# EAGLE board mlx90621_panel_shield (EAGLE 7.3.0)
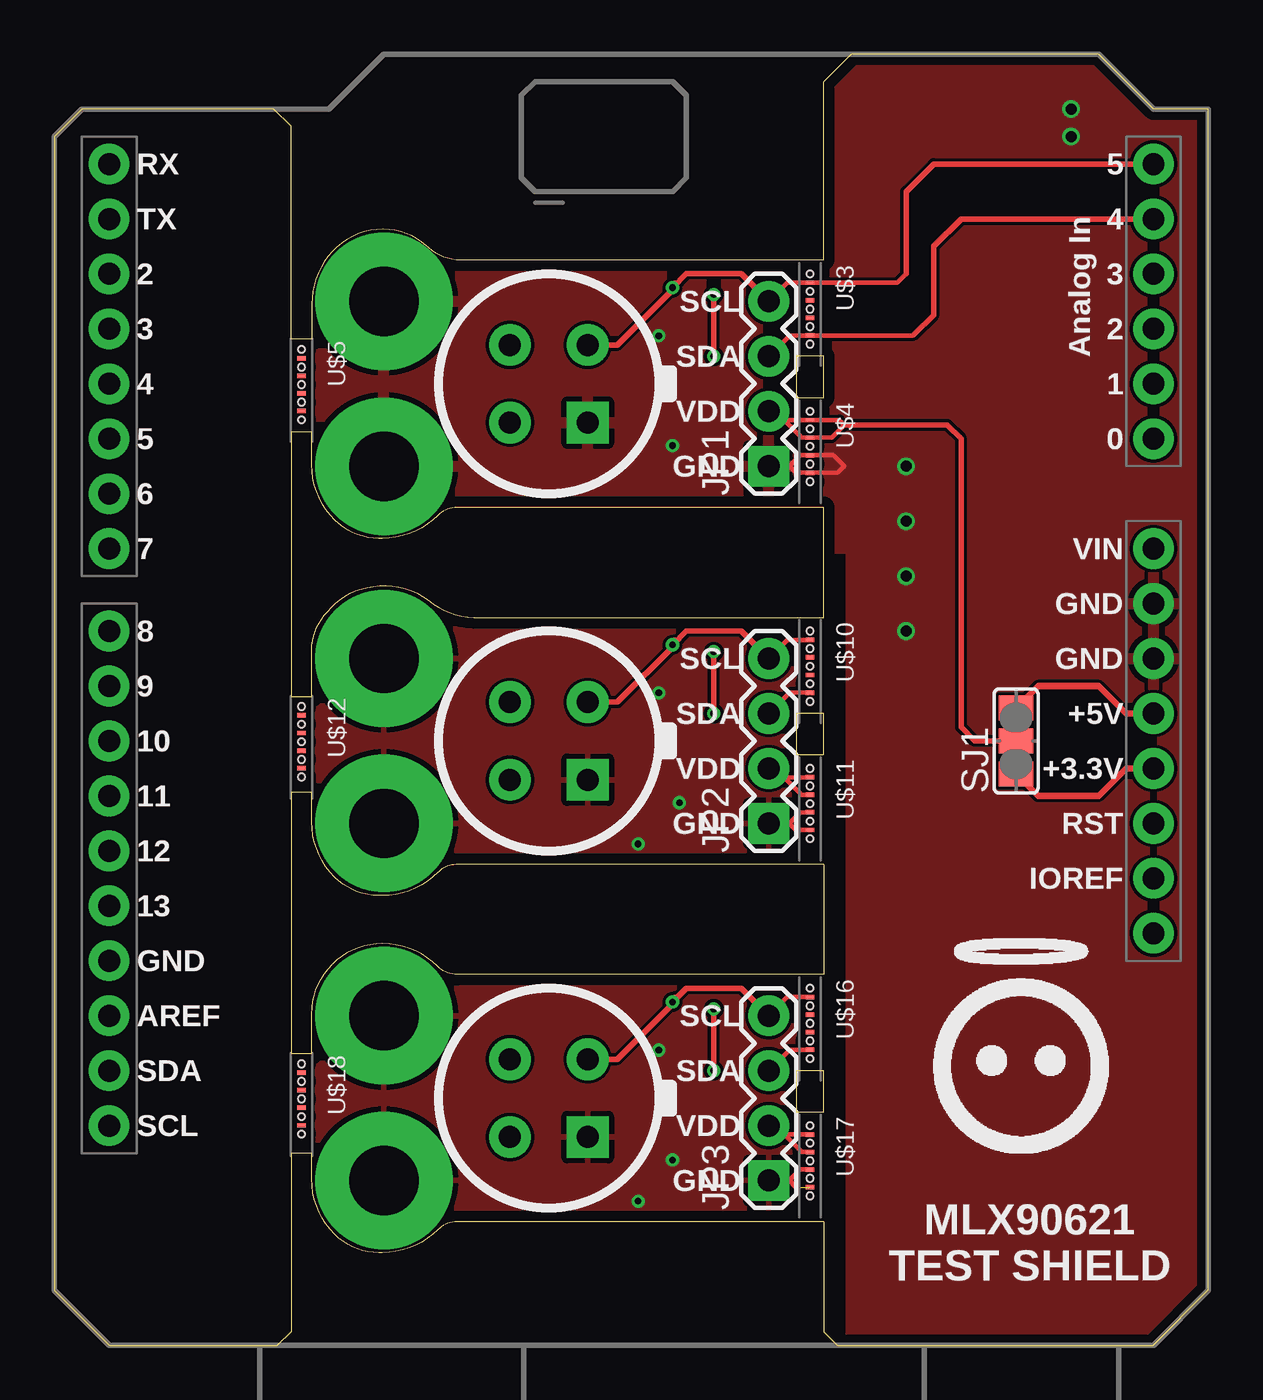
[diagram p0: board, top side]
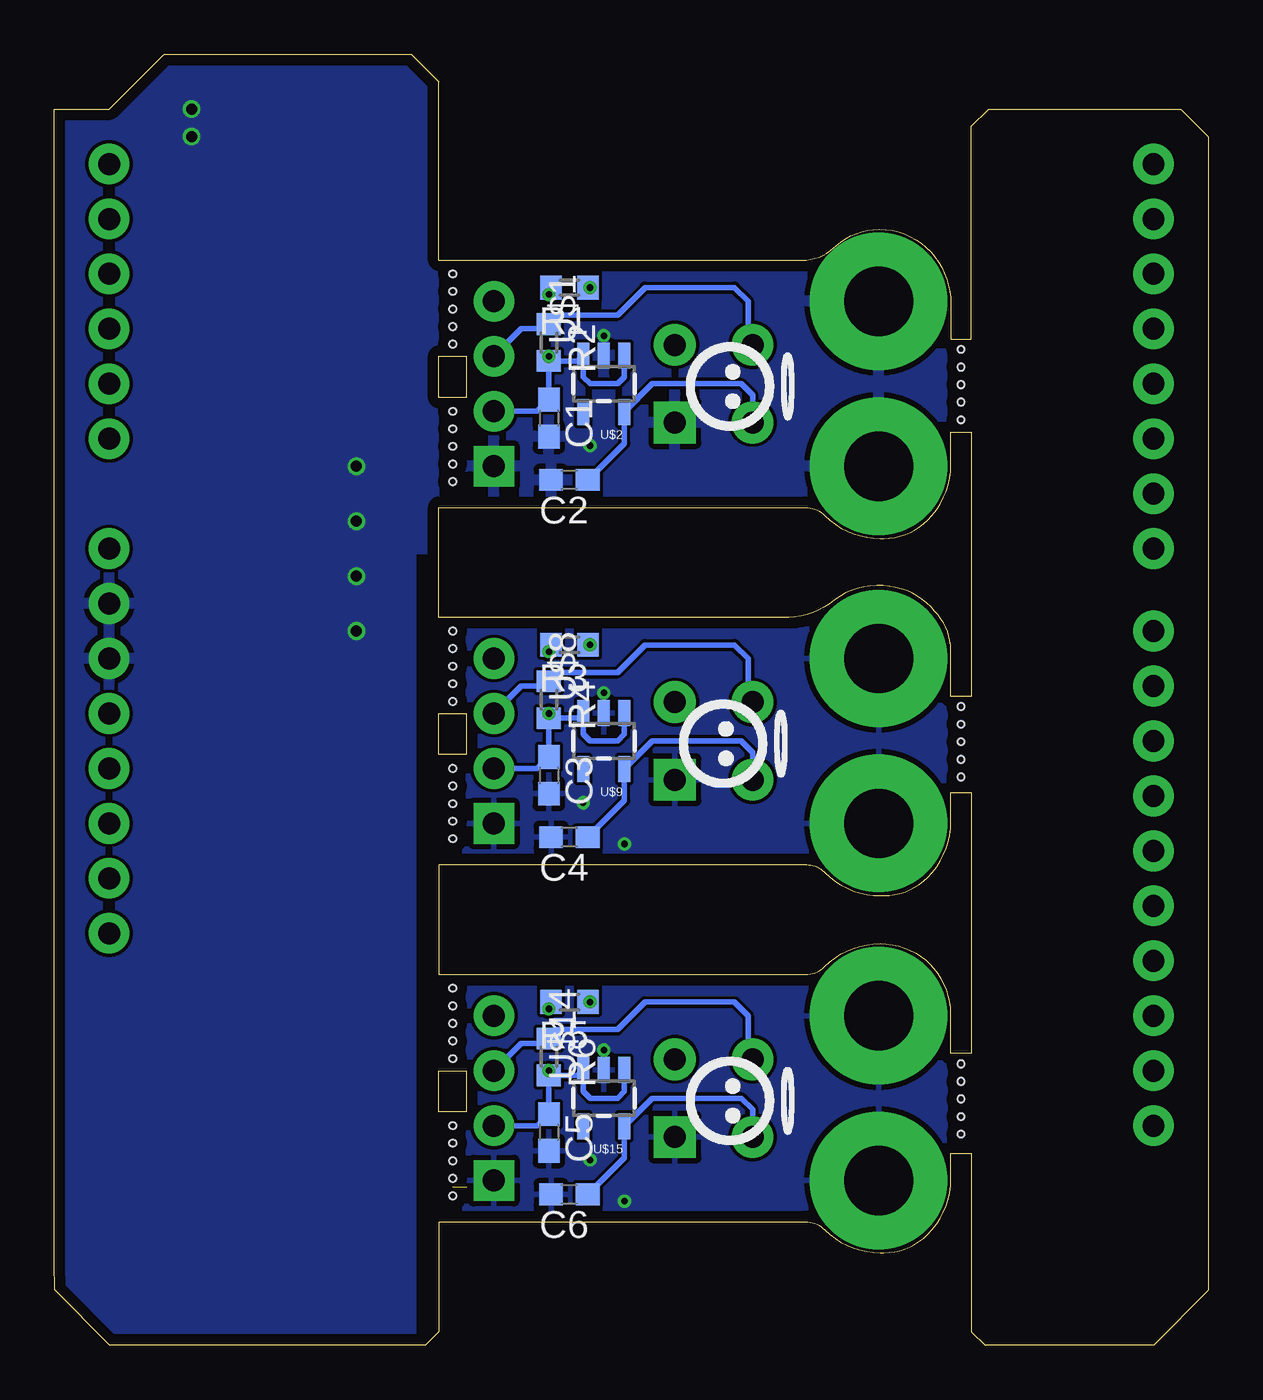
[diagram p1: board, bottom side, seen from below]

Size 53.34 x 59.69 mm. Coordinates in mm from the lower left corner, seen from the top.
Outline: 0,2.54 2.54,0 10.32,0 10.95,0.64 10.95,8.89 11.91,8.89 11.91,7.69 arc45 12.97,5.13 arc45 15,4.29 15.17,4.29 arc45 17.73,5.35 arc-45 18.62,5.71 35.56,5.71 35.56,0.64 36.2,0 50.78,0 53.32,2.56 53.34,3.81 53.34,57.15 50.8,57.15 48.26,59.69 36.83,59.69 35.56,58.42 35.56,50.16 18.79,50.16 arc-42 17.31,50.73 17.2,50.83 arc42 15.21,51.59 arc47 12.84,50.55 arc43 11.91,48.14 11.91,46.51 10.95,46.51 10.95,56.36 10.16,57.15 1.27,57.15 0,55.88 0,2.54
Outline: 35.56,38.73 18.62,38.73 arc45 17.73,38.37 arc-45 15.17,37.31 15,37.31 arc-45 12.97,38.15 arc-45 11.91,40.71 11.91,42.23 10.95,42.23 10.95,30 11.91,30 11.91,32.14 arc-45 12.64,33.91 arc-45 14.74,35.08 arc-45 17.3,34.46 arc45 19.68,33.66 35.56,33.66 35.56,38.73
Outline: 35.56,43.81 35.56,45.72 34.29,45.72 34.29,43.81 35.56,43.81
Outline: 35.56,22.23 18.57,22.23 arc45 17.76,21.89 17.73,21.86 arc-45 15.17,20.8 15,20.8 arc-45 12.97,21.64 arc-45 11.91,24.2 11.91,25.56 10.95,25.56 10.95,13.49 11.91,13.49 11.91,15.33 arc-45 12.85,17.62 arc-45 15.17,18.57 arc-45 17.73,17.51 arc45 18.62,17.14 35.56,17.14 35.56,22.23
Outline: 35.56,27.3 35.56,29.21 34.29,29.21 34.29,27.3 35.56,27.3
Outline: 35.56,10.79 35.56,12.7 34.29,12.7 34.29,10.79 35.56,10.79
Copper layers (1*16): Top 0.035mm / dielectric 1.6mm / Bottom 0.035mm
Design rules "Elecrow_2-layer_PCB_eagle_rule": minimum track width 6mil, minimum drill 12mil, track to track 6mil, track to pad 6mil, pad to pad 6mil, via to via 8mil, smd to smd 0mil, copper to edge 20mil, drill to drill 10mil, minimum pad ring 6mil, minimum via ring 6mil, stop-mask expansion 0mil, vias tented up to drill 100mil, thermal gap 10mil

## Footprints (pad centres in the part's own frame; a part is rotated, then mirrored left to right if it is on the bottom)
C0603 = smd 1.1 x 1: 1 -0.85,0; 2 0.85,0
UNO_R3_SHIELD = drill 1.016 pad 1.88: 3.3V 50.8,26.67; 5V 50.8,29.21; A0 50.8,41.91; A1 50.8,44.45; A2 50.8,46.99; A3 50.8,49.53; A4 50.8,52.07; A5 50.8,54.61; AREF 2.54,15.24; D2 2.54,49.53; D3 2.54,46.99; D4 2.54,44.45; D5 2.54,41.91; D6 2.54,39.37; D7 2.54,36.83; D8 2.54,33.02; D9 2.54,30.48; D10 2.54,27.94; D11 2.54,25.4; D12 2.54,22.86; D13 2.54,20.32; GND@0 50.8,31.75; GND@1 50.8,34.29; GND@2 2.54,17.78; IOREF 50.8,21.59; NC 50.8,19.05; RES 50.8,24.13; RX 2.54,54.61; SCL 2.54,10.16; SDA 2.54,12.7; TX 2.54,52.07; VIN 50.8,36.83
1X04 = drill 1.016 pad 1.88 square: 1 0,0 | drill 1.016 pad 1.88: 2 2.54,0; 3 5.08,0; 4 7.62,0
R0603 = smd 1 x 1.1: 1 -0.85,0; 2 0.85,0
STANDOFF-ELECTRICAL = drill 3.2 pad 6.35: P1 0,0
SJ_2 = smd 1.168 x 1.6: 1 -1.524,0; 2 0,0; 3 1.524,0
MLX90621 = drill 1.016 pad 1.93: SCL -1.796,-1.796; SDA -1.796,1.796; VDD 1.796,1.796 | drill 1.016 pad 1.93 square: VSS 1.796,-1.796
VREG_SOT23-5 = smd 0.55 x 1.2: 1 -0.95,-1.3; 2 0,-1.3; 3 0.95,-1.3; 4 0.95,1.3; 5 -0.95,1.3
MOUSE-BITES-4 = smd 0.203 x 0.406: 1 0.406,0; 2 1.219,0; 3 2.032,0; 4 2.845,0 | hole 0.305: 0,0; 0.813,0; 1.626,0; 2.438,0; 3.251,0

## Placement (x,y rotation side)
C1  100n  [C0603]  30.48,42.86 270 bottom
C2  100n  [C0603]  29.53,40.01 180 bottom
C3  100n  [C0603]  30.48,26.35 270 bottom
C4  100n  [C0603]  29.53,23.5 180 bottom
C5  100n  [C0603]  30.48,9.84 270 bottom
C6  100n  [C0603]  29.53,6.99 180 bottom
E$1  [DA_LOGO_10MM]  40.64,8.89 0 top
E$2  [DA_LOGO_5MM]  24.13,13.34 270 bottom
E$3  [DA_LOGO_5MM]  24.45,29.84 270 bottom
E$4  [DA_LOGO_5MM]  24.13,46.35 270 bottom
J1  ARDUINO_R3_SHIELD  [UNO_R3_SHIELD]  0,0 0 top
JP1  [1X04]  33.02,40.64 90 top
JP2  [1X04]  33.02,24.13 90 top
JP3  [1X04]  33.02,7.62 90 top
R1  10k  [R0603]  29.53,48.9 180 bottom
R2  10k  [R0603]  30.48,46.35 270 bottom
R3  10k  [R0603]  29.53,32.38 180 bottom
R4  10k  [R0603]  30.48,29.84 270 bottom
R5  10k  [R0603]  29.53,15.88 180 bottom
R6  10k  [R0603]  30.48,13.34 270 bottom
S1  STANDOFF_ELECTRICAL  [STANDOFF-ELECTRICAL]  15.24,40.64 90 top
S2  STANDOFF_ELECTRICAL  [STANDOFF-ELECTRICAL]  15.24,48.26 90 top
S3  STANDOFF_ELECTRICAL  [STANDOFF-ELECTRICAL]  15.24,24.13 90 top
S4  STANDOFF_ELECTRICAL  [STANDOFF-ELECTRICAL]  15.24,31.75 90 top
S5  STANDOFF_ELECTRICAL  [STANDOFF-ELECTRICAL]  15.24,7.62 90 top
S6  STANDOFF_ELECTRICAL  [STANDOFF-ELECTRICAL]  15.24,15.24 90 top
SJ1  [SJ_2]  44.45,27.94 90 top
U$1  MLX90621BAD  [MLX90621]  22.86,44.45 270 bottom
U$2  ZXCL260  [VREG_SOT23-5]  27.94,44.45 180 bottom
U$3  MOUSE-BITES-4  [MOUSE-BITES-4]  34.92,49.53 270 top
U$4  MOUSE-BITES-4  [MOUSE-BITES-4]  34.92,43.18 270 top
U$5  MOUSE-BITES-4  [MOUSE-BITES-4]  11.43,46.04 270 top
U$8  MLX90621BAD  [MLX90621]  22.86,27.94 270 bottom
U$9  ZXCL260  [VREG_SOT23-5]  27.94,27.94 180 bottom
U$10  MOUSE-BITES-4  [MOUSE-BITES-4]  34.92,33.02 270 top
U$11  MOUSE-BITES-4  [MOUSE-BITES-4]  34.92,26.67 270 top
U$12  MOUSE-BITES-4  [MOUSE-BITES-4]  11.43,29.53 270 top
U$14  MLX90621BAD  [MLX90621]  22.86,11.43 270 bottom
U$15  ZXCL260  [VREG_SOT23-5]  27.94,11.43 180 bottom
U$16  MOUSE-BITES-4  [MOUSE-BITES-4]  34.92,16.51 270 top
U$17  MOUSE-BITES-4  [MOUSE-BITES-4]  34.92,10.16 270 top
U$18  MOUSE-BITES-4  [MOUSE-BITES-4]  11.43,13.02 270 top

## Library data of the parts
C1-C6 R1-R6 = adafruit
E$1-E$4 = DA_logo
J1 = SparkFun-Boards
JP1-JP3 = SparkFun-Connectors; PROD_ID: CONN-09696
S1-S6 = SparkFun-Electromechanical
SJ1 = jumper
U$1 U$2 U$8 U$9 U$14 U$15 = melexis
U$3-U$5 U$10-U$12 U$16-U$18 = mouse-bites

## Nets
+3V3: J1.3.3V SJ1.1
+5V: J1.5V SJ1.3
GND: C1.2 C2.2 J1.GND@0 J1.GND@1 JP1.1 S1.P1 S2.P1 U$1.VSS U$2.2 U$4.3 U$4.4
GND1: C3.2 C4.2 JP2.1 S3.P1 S4.P1 U$8.VSS U$9.2 U$11.3 U$11.4
GND2: C5.2 C6.2 JP3.1 S5.P1 S6.P1 U$14.VSS U$15.2 U$17.3 U$17.4
SCL: J1.A5 JP1.4 R1.1 U$1.SCL U$3.1
SCL1: JP2.4 R3.1 U$8.SCL U$10.1
SCL2: JP3.4 R5.1 U$14.SCL U$16.1
SDA: J1.A4 JP1.3 R2.1 U$1.SDA U$3.4
SDA1: JP2.3 R4.1 U$8.SDA U$10.4
SDA2: JP3.3 R6.1 U$14.SDA U$16.4
VCC: C1.1 JP1.2 R1.2 R2.2 SJ1.2 U$2.1 U$2.3 U$4.1 U$4.2
VCC1: C3.1 JP2.2 R3.2 R4.2 U$9.1 U$9.3 U$11.1 U$11.2
VCC2: C5.1 JP3.2 R5.2 R6.2 U$15.1 U$15.3 U$17.1 U$17.2
VDD: C2.1 U$1.VDD U$2.5
VDD1: C4.1 U$8.VDD U$9.5
VDD2: C6.1 U$14.VDD U$15.5

## Tracks (layer width: path | path; a pad name or v marks a point on that pad's centre or on a via)
+3V3
  Top 0.305: J1.3.3V 49.53,26.67 48.26,25.4 45.47,25.4 SJ1.1
+5V
  Top 0.305: J1.5V 49.53,29.21 48.26,30.48 45.47,30.48 SJ1.3
GND  (via drill 0.3, 0.51)
  Top 0.203: 33.97,40.64 34.28,40.34 U$4.4 36.21,40.34 36.51,40.64 36.01,41.15 U$4.3 34.48,41.15 33.97,40.64 | 32.7,40.64 33.97,40.64
  other vias: 27.94,46.67 46.99,57.15 46.99,55.88 39.37,40.64 39.37,35.56 39.37,38.1 39.37,33.02 28.57,41.59
  pour Top: 36.83,0 36.83,36.83 11.43,36.83 11.43,59.69 48.26,59.69 50.8,57.15 53.34,57.15 53.34,2.54 50.8,0
  pour Bottom: 36.83,0 36.83,36.83 11.43,36.83 11.43,59.69 48.26,59.69 50.8,57.15 53.34,57.15 53.34,2.54 50.8,0
GND1  (via drill 0.3)
  Top 0.203: U$11.4 34.28,23.82 33.97,24.13 | U$11.3 34.48,24.64 33.97,24.13 | 32.7,24.13 33.97,24.13
  other vias: 27.94,30.16 28.89,25.08 26.99,23.18
  pour Bottom: 35.56,22.23 18.1,22.23 16.67,20.8 13.97,20.8 11.91,22.86 11.91,33.34 13.81,35.24 16.51,35.24 18.26,33.66 35.24,33.5 35.56,33.81
  pour Top: 35.56,22.23 18.1,22.23 16.83,20.95 13.65,20.95 11.75,22.86 11.75,33.18 13.81,35.24 16.67,35.24 18.26,33.66 35.56,33.66
GND2  (via drill 0.3)  (1 unrouted)
  Top 0.203: 34.28,7.32 33.97,7.62 | U$17.3 34.48,8.13 33.97,7.62 | 32.7,7.62 33.97,7.62
  other vias: 27.94,13.65 28.57,8.57 26.99,6.67
  pour Top: 35.4,17.14 18.26,17.14 16.51,18.89 13.97,18.89 11.91,16.83 11.91,6.19 13.81,4.29 16.99,4.29 18.41,5.71 35.56,5.71 35.56,17.14
  pour Bottom: 18.26,17.14 16.51,18.89 14.13,18.89 11.91,16.67 11.91,6.19 13.81,4.29 16.99,4.29 18.41,5.71 35.56,5.71 35.56,17.14
SCL  (via drill 0.3)
  Top 0.203: JP1.4 33.88,49.12 U$3.1 38.96,49.12 39.37,49.53
  Top 0.254: JP1.4 31.75,49.53 29.21,49.53 v28.57,48.9 28.68,49.11 R1.1 26.03,46.25 U$1.SCL | 39.37,49.53 39.37,53.34 40.64,54.61 J1.A5
  Bottom 0.254: v28.57,48.9 28.57,49.11 R1.1
SCL1  (via drill 0.3)
  Top 0.203: U$10.1 33.88,32.61 JP2.4
  Top 0.254: JP2.4 31.75,33.02 29.21,33.02 v28.57,32.38 28.68,32.6 R3.1 26.03,29.74 U$8.SCL
  Bottom 0.254: v28.57,32.38 28.57,32.6 R3.1
SCL2  (via drill 0.3)
  Top 0.203: U$16.1 33.88,16.1 JP3.4
  Top 0.254: JP3.4 31.75,16.51 29.21,16.51 v28.57,15.88 28.68,16.09 R5.1 26.03,13.23 U$14.SCL
  Bottom 0.254: v28.57,15.88 28.57,16.09 R5.1
SDA
  Top 0.203: JP1.3 33.98,46.69 U$3.4 39.7,46.69 39.75,46.74
  Top 0.254: 39.75,46.74 40.64,47.62 40.64,50.8 41.91,52.07 J1.A4
  Bottom 0.254: JP1.3 31.75,46.99 30.7,46.99 R2.1 30.48,47.31 30.16,47.62 27.3,47.62 26.04,48.9 21.91,48.9 21.27,48.26 21.27,46.45 U$1.SDA
SDA1
  Top 0.203: U$10.4 33.98,30.18 JP2.3
  Bottom 0.254: JP2.3 31.75,30.48 30.7,30.48 R4.1 30.48,30.8 30.16,31.11 27.3,31.11 26.04,32.38 21.91,32.38 21.27,31.75 21.27,29.95 U$8.SDA
SDA2
  Top 0.203: U$16.4 33.98,13.66 JP3.3
  Bottom 0.254: JP3.3 31.75,13.97 30.7,13.97 R6.1 30.48,14.29 30.16,14.61 27.3,14.61 26.04,15.88 21.91,15.88 21.27,15.24 21.27,13.43 U$14.SDA
VCC  (via drill 0.3)
  Top 0.203: 33.74,42.77 34.56,41.96 U$4.2 35.93,41.96 36.51,42.55 36.28,42.77 U$4.1 33.74,42.77 | 33.74,42.77 33.66,42.86
  Top 0.254: v30.48,45.72 v30.48,48.58 | 33.66,42.86 33.34,42.86 JP1.2 | SJ1.2 42.55,27.94 41.91,28.57 41.91,41.91 41.27,42.55 36.51,42.55
  Bottom 0.254: JP1.2 31.01,43.18 C1.1 R2.2 | R2.2 29.14,45.51 U$2.3 28.89,44.77 28.57,44.45 27.3,44.45 26.99,44.77 U$2.1 | R2.2 v30.48,45.72 | v30.48,48.58 R1.2
VCC1  (via drill 0.3)
  Top 0.203: U$11.2 34.56,25.45 33.74,26.26 | U$11.1 33.74,26.26 | 33.74,26.26 33.66,26.35
  Top 0.254: v30.48,29.21 v30.48,32.07 | 33.66,26.35 33.34,26.35 JP2.2
  Bottom 0.254: JP2.2 31.01,26.67 C3.1 R4.2 | R4.2 29.14,29 U$9.3 28.89,28.26 28.57,27.94 27.3,27.94 26.99,28.25 U$9.1 | R4.2 v30.48,29.21 | v30.48,32.07 R3.2
VCC2  (via drill 0.3)
  Top 0.203: U$17.2 34.56,8.94 33.74,9.75 | U$17.1 33.74,9.75 | 33.74,9.75 33.66,9.84
  Top 0.254: v30.48,12.7 v30.48,15.56 | 33.66,9.84 33.34,9.84 JP3.2
  Bottom 0.254: JP3.2 31.01,10.16 C5.1 R6.2 | R6.2 29.14,12.48 U$15.3 28.89,11.75 28.57,11.43 27.3,11.43 26.99,11.74 U$15.1 | R6.2 v30.48,12.7 | v30.48,15.56 R5.2
VDD
  Bottom 0.254: C2.1 26.99,41.69 U$2.5 25.69,44.45 21.59,44.45 21.06,43.92 U$1.VDD
VDD1
  Bottom 0.254: C4.1 26.99,25.18 U$9.5 25.69,27.94 21.59,27.94 21.06,27.41 U$8.VDD
VDD2
  Bottom 0.254: C6.1 26.99,8.67 U$15.5 25.69,11.43 21.59,11.43 21.06,10.9 U$14.VDD

## Text on the board
tPlace: SCL | SDA | VDD | GND | SCL | SDA | VDD | GND | SCL | SDA | VDD | GND | MLX90621 / TEST SHIELD